# EAGLE board pulser (EAGLE 9.5.0)
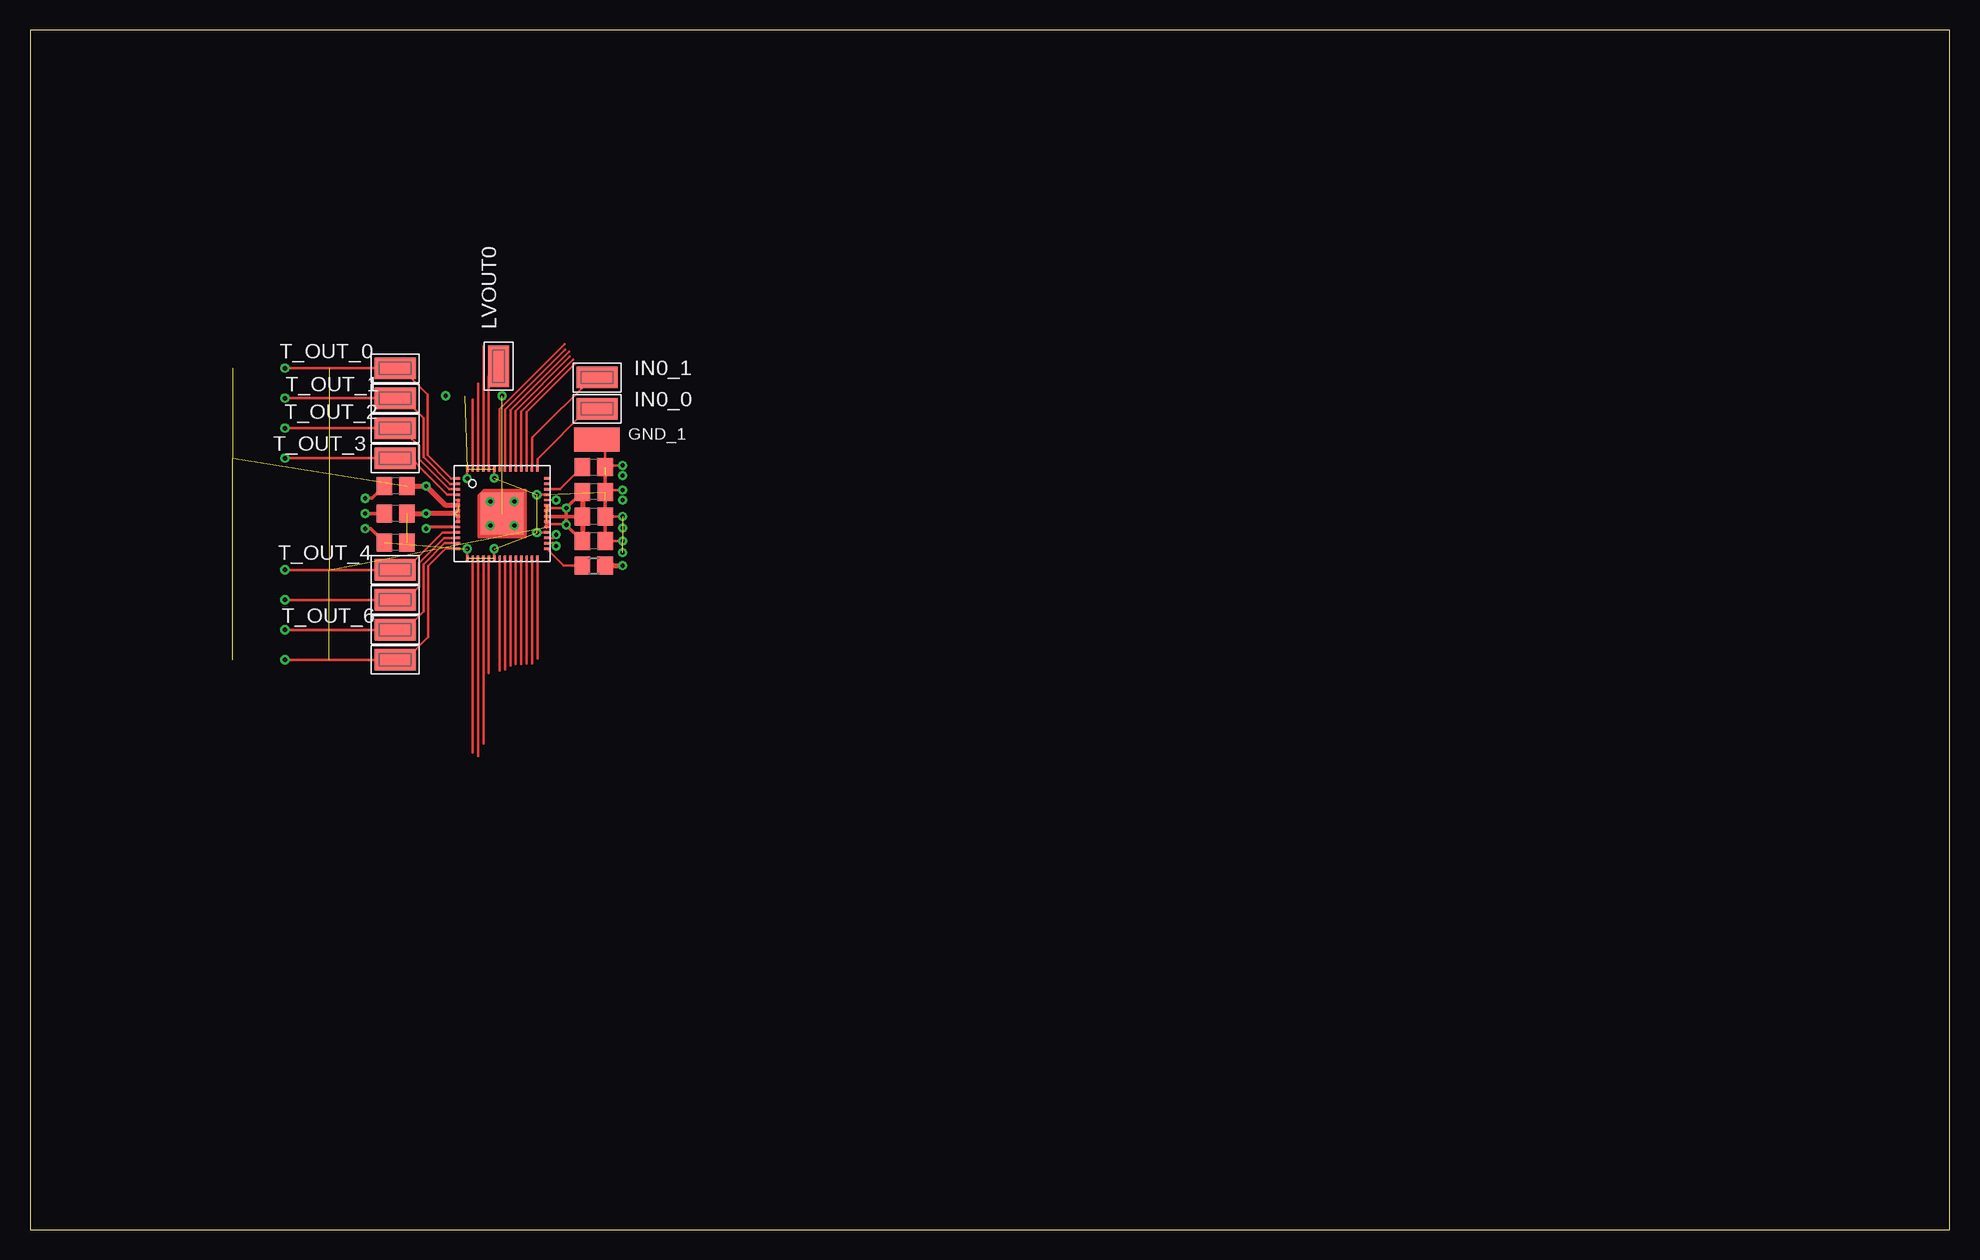
[diagram p0: board, top side]
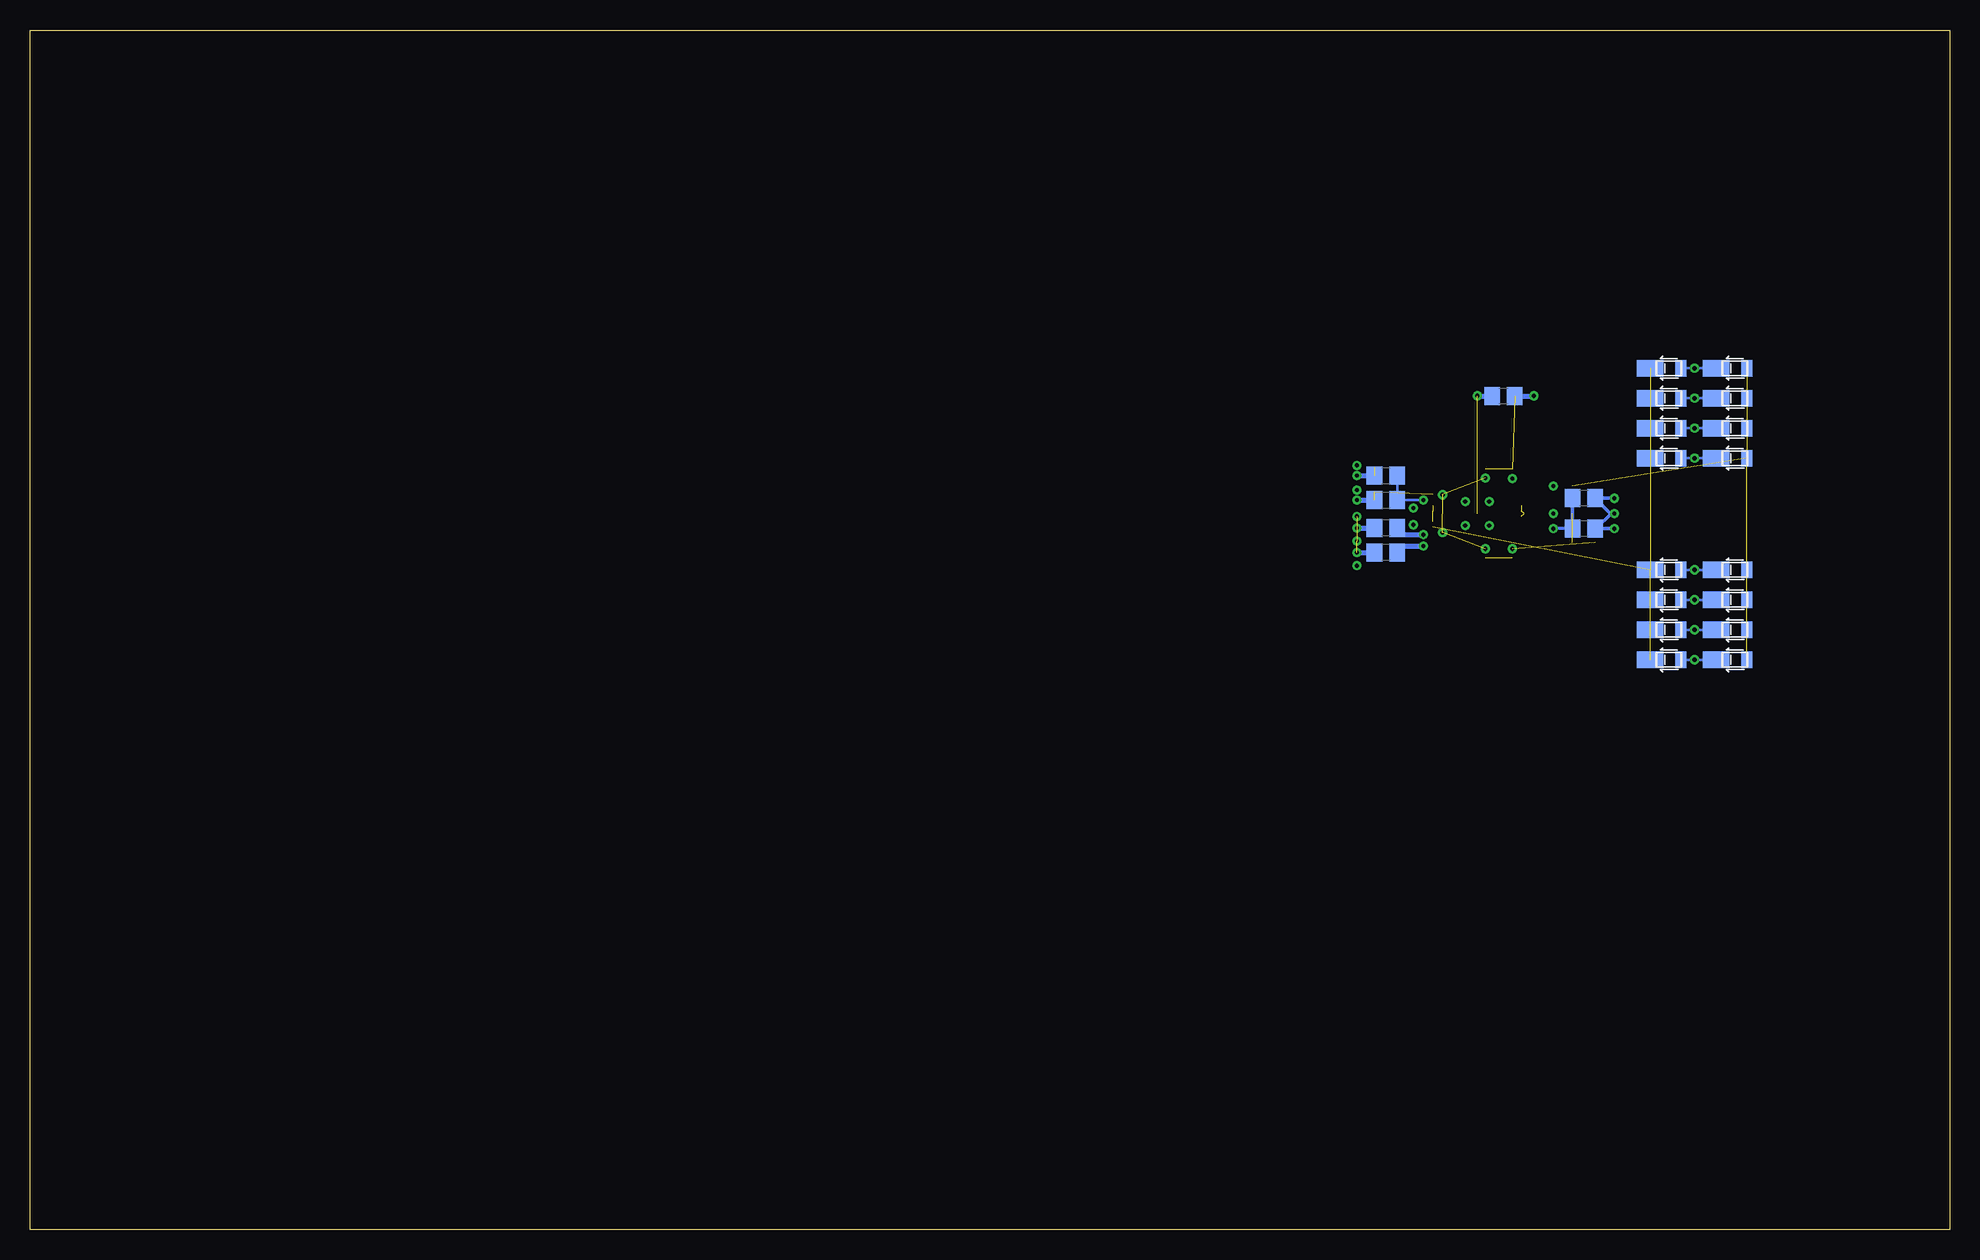
[diagram p1: board, bottom side, seen from below]

Size 160 x 100 mm. Coordinates in mm from the lower left corner, seen from the top.
Outline: 0,0 160,0 160,100 0,100 0,0
Copper layers (1*16): Top 0.035mm / dielectric 0.15mm / Bottom 0.035mm
Design rules "default": minimum track width 6mil, minimum drill 0.35mm, track to track 6mil, track to pad 6mil, pad to pad 6mil, via to via 6mil, smd to smd 6mil, copper to edge 40mil, drill to drill 6mil, minimum pad ring 10mil, minimum via ring 8mil, stop-mask expansion 4mil, vias tented up to drill 0mil, thermal gap 10mil
Net classes: 1 power_cw: width 0.2 mm; 2 power: width 0.3 mm

## Footprints (pad centres in the part's own frame; a part is rotated, then mirrored left to right if it is on the bottom)
C0805 = smd 1.3 x 1.5: 1 -0.95,0; 2 0.95,0
POWERDI-123 = smd 0.9 x 1.4: A -1.6,0 | smd 2.2 x 1.4: C 0.95,0
TP380X203 = smd 3.8 x 2.03: 1 0,0
KEYSTONE_5015 = smd 3.43 x 1.78: 1 0,0
R0805 = smd 1.3 x 1.5: 1 -0.95,0; 2 0.95,0
TFLGA-56LD = smd 0.4 x 0.2: AGND 3.7,-1.575; CK 3.7,2.925; CW 3.7,2.475; DGND 3.7,1.575; DVDD 3.7,2.025; HVM@1 -3.7,1.125; HVM@2 -3.7,0.675; HVM@3 -3.7,0.225; HVM@4 -3.7,-0.225; HVM@5 -3.7,-0.675; HVM_CW -3.7,-1.125; HVP@1 3.7,0.675; HVP@2 3.7,0.225; HVP@3 3.7,-0.225; HVP@4 3.7,-0.675; HVP@5 3.7,-1.125; HVP_CW 3.7,1.125; THSD 3.7,-2.925; VDDM 3.7,-2.025; VDDP 3.7,-2.475; XDCR_1 -3.7,2.925; XDCR_2 -3.7,2.475; XDCR_3 -3.7,2.025; XDCR_4 -3.7,1.575; XDCR_5 -3.7,-1.575; XDCR_6 -3.7,-2.025; XDCR_7 -3.7,-2.475; XDCR_8 -3.7,-2.925 | smd 0.2 x 0.4: GND_PWR@1 -2.925,-3.7; GND_PWR@2 -0.675,-3.7; GND_PWR@3 -0.675,3.7; GND_PWR@4 -2.925,3.7; IN1_0 2.925,3.7; IN1_1 2.475,3.7; IN2_0 2.025,3.7; IN2_1 1.575,3.7; IN3_0 1.125,3.7; IN3_1 0.675,3.7; IN4_0 0.225,3.7; IN4_1 -0.225,3.7; IN5_0 -0.225,-3.7; IN5_1 0.225,-3.7; IN6_0 0.675,-3.7; IN6_1 1.125,-3.7; IN7_0 1.575,-3.7; IN7_1 2.025,-3.7; IN8_0 2.475,-3.7; IN8_1 2.925,-3.7; LVOUT_1 -1.125,3.7; LVOUT_2 -1.575,3.7; LVOUT_3 -2.025,3.7; LVOUT_4 -2.475,3.7; LVOUT_5 -2.475,-3.7; LVOUT_6 -2.025,-3.7; LVOUT_7 -1.575,-3.7; LVOUT_8 -1.125,-3.7 | smd 3.5 x 3.5: SUB 0,0

## Placement (x,y rotation side)
C170  220n 100V  [C0805]  37.19,69.5 0 bottom
C172  220n 100V  [C0805]  47,61.5 180 top
C174  220n 100V  [C0805]  47,59.45 180 top
C175  220n 100V  [C0805]  47,57.4 180 top
C177  220n 100V  [C0805]  46.99,60.81 0 bottom
C178  220n 100V  [C0805]  46.99,62.85 0 bottom
C180  220n 100V  [C0805]  46.99,56.43 180 bottom
C181  220n 100V  [C0805]  46.99,58.47 180 bottom
C182  220n 100V  [C0805]  46.99,63.55 0 top
C183  220n 100V  [C0805]  30.48,61.98 180 top
C184  220n 100V  [C0805]  30.48,59.69 180 top
C185  220n 100V  [C0805]  30.48,57.28 180 top
C190  220n 100V  [C0805]  30.48,58.42 180 bottom
C191  220n 100V  [C0805]  30.48,60.96 180 bottom
D0_0  [POWERDI-123]  24,71.8 180 bottom
D0_1  [POWERDI-123]  18.5,71.8 180 bottom
D1_0  [POWERDI-123]  24,69.3 180 bottom
D1_1  [POWERDI-123]  18.5,69.3 180 bottom
D2_0  [POWERDI-123]  24,66.8 180 bottom
D2_1  [POWERDI-123]  18.5,66.8 180 bottom
D3_0  [POWERDI-123]  24,64.3 180 bottom
D3_1  [POWERDI-123]  18.5,64.3 180 bottom
D4_0  [POWERDI-123]  24,55 180 bottom
D4_1  [POWERDI-123]  18.5,55 180 bottom
D5_0  [POWERDI-123]  24,52.5 180 bottom
D5_1  [POWERDI-123]  18.5,52.5 180 bottom
D6_0  [POWERDI-123]  24,50 180 bottom
D6_1  [POWERDI-123]  18.5,50 180 bottom
D7_0  [POWERDI-123]  24,47.5 180 bottom
D7_1  [POWERDI-123]  18.5,47.5 180 bottom
GND_1  5019  [TP380X203]  47.26,65.85 0 top
IN0_0  5015  [KEYSTONE_5015]  47.26,68.42 0 top
IN0_1  5015  [KEYSTONE_5015]  47.26,71.03 0 top
LVOUT0  5015  [KEYSTONE_5015]  39.06,71.96 90 top
R2  10k  [R0805]  46.99,55.34 0 top
STHV_0  STHV800  [TFLGA-56LD]  39.37,59.69 0 top
T_OUT_0  5015  [KEYSTONE_5015]  30.45,71.8 0 top
T_OUT_1  5015  [KEYSTONE_5015]  30.45,69.3 0 top
T_OUT_2  5015  [KEYSTONE_5015]  30.45,66.8 0 top
T_OUT_3  5015  [KEYSTONE_5015]  30.45,64.3 0 top
T_OUT_4  5015  [KEYSTONE_5015]  30.45,55 0 top
T_OUT_5  5015  [KEYSTONE_5015]  30.45,52.5 0 top
T_OUT_6  5015  [KEYSTONE_5015]  30.45,50 0 top
T_OUT_7  5015  [KEYSTONE_5015]  30.45,47.5 0 top

## Library data of the parts
C170 C172 C174 C175 C177 C178 C180-C185 C190 C191 = rcl; SPICEPREFIX: C
D0_0 D0_1 D1_0 D1_1 D2_0 D2_1 D3_0 D3_1 D4_0 D4_1 D5_0 D5_1 D6_0 D6_1 D7_0 D7_1 = dfls130l-7; MF: Diodes Inc; MOUSER: SBR1U200P1-7; MPN: SBR1U200P1
GND_1 = 5019; AVAILABILITY: Good; DESCRIPTION: Phosphor Bronze Contact Miniature Silver Plated Surface Mount Test Points; MF: Keystone; MP: 5019; PACKAGE: 2010 Keystone; PRICE: 0.18 USD
IN0_0 IN0_1 LVOUT0 T_OUT_0 T_OUT_1-T_OUT_7 = keystone_5015; AVAILABILITY: Unavailable; DESCRIPTION: Test Point; Black; Surface Mount; Wire Leaded; Polycarbonate; 0.04 in.; MF: Keystone Electronics; MP: 5015; PACKAGE: Keystone Electronics; PRICE: None
R2 = rcl
STHV_0 = wouter

## Nets
CLK: STHV_0.CK
CW: STHV_0.CW
DVDD: C182.1 STHV_0.DVDD
GND [power_cw]: C170.2 C172.1 C174.1 C175.1 C177.1 C178.1 C180.2 C181.2 C182.2 C183.2 C184.2 C185.2 C190.1 C191.1 GND_1.1 STHV_0.AGND STHV_0.DGND STHV_0.GND_PWR@1 STHV_0.GND_PWR@2 STHV_0.GND_PWR@3 STHV_0.GND_PWR@4
HVM [power]: C183.1 C184.1 C185.1 D0_1.A D1_1.A D2_1.A D3_1.A D4_1.A D5_1.A D6_1.A D7_1.A STHV_0.HVM@1 STHV_0.HVM@2 STHV_0.HVM@3 STHV_0.HVM@4 STHV_0.HVM@5
HVM_CW [power_cw]: C190.2 C191.2 STHV_0.HVM_CW
HVP [power]: C172.2 C174.2 C175.2 D0_0.C D1_0.C D2_0.C D3_0.C D4_0.C D5_0.C D6_0.C D7_0.C STHV_0.HVP@1 STHV_0.HVP@2 STHV_0.HVP@3 STHV_0.HVP@4 STHV_0.HVP@5
HVP_CW: C177.2 C178.2 STHV_0.HVP_CW
IN0_0: IN0_0.1 STHV_0.IN1_0
IN0_1: IN0_1.1 STHV_0.IN1_1
IN1_0: STHV_0.IN2_0
IN1_1: STHV_0.IN2_1
IN2_0: STHV_0.IN3_0
IN2_1: STHV_0.IN3_1
IN3_0: STHV_0.IN4_0
IN3_1: STHV_0.IN4_1
IN4_0: STHV_0.IN5_0
IN4_1: STHV_0.IN5_1
IN5_0: STHV_0.IN6_0
IN5_1: STHV_0.IN6_1
IN6_0: STHV_0.IN7_0
IN6_1: STHV_0.IN7_1
IN7_0: STHV_0.IN8_0
IN7_1: STHV_0.IN8_1
LVOUT_0 [low_voltage]: LVOUT0.1 STHV_0.LVOUT_1
LVOUT_1 [low_voltage]: STHV_0.LVOUT_2
LVOUT_2 [low_voltage]: STHV_0.LVOUT_3
LVOUT_3 [low_voltage]: STHV_0.LVOUT_4
LVOUT_4 [low_voltage]: STHV_0.LVOUT_5
LVOUT_5 [low_voltage]: STHV_0.LVOUT_6
LVOUT_6 [low_voltage]: STHV_0.LVOUT_7
LVOUT_7 [low_voltage]: STHV_0.LVOUT_8
N$23: R2.1 STHV_0.THSD
N$24: C170.1 STHV_0.SUB
OUT_0: D0_0.A D0_1.C STHV_0.XDCR_1 T_OUT_0.1
OUT_1: D1_0.A D1_1.C STHV_0.XDCR_2 T_OUT_1.1
OUT_2: D2_0.A D2_1.C STHV_0.XDCR_3 T_OUT_2.1
OUT_3: D3_0.A D3_1.C STHV_0.XDCR_4 T_OUT_3.1
OUT_4: D4_0.A D4_1.C STHV_0.XDCR_5 T_OUT_4.1
OUT_5: D5_0.A D5_1.C STHV_0.XDCR_6 T_OUT_5.1
OUT_6: D6_0.A D6_1.C STHV_0.XDCR_7 T_OUT_6.1
OUT_7: D7_0.A D7_1.C STHV_0.XDCR_8 T_OUT_7.1
VDD: R2.2
VDDM [power_cw]: C181.1 STHV_0.VDDM
VDDP [power_cw]: C180.1 STHV_0.VDDP

## Tracks (layer width: path | path; a pad name or v marks a point on that pad's centre or on a via)
DVDD
  Top 0.2: 45.72,63.55 C182.1 44.2,61.72 44.19,61.72 STHV_0.DVDD
  Top 0.3: C182.1 46.04,63.87
GND  (via drill 0.35)  (16 unrouted)
  Top 0.2: C175.1 v49.4,57.4 | C174.1 v49.4,59.45 | C172.1 48.1,61.65 v49.4,61.65 | v49.4,63.7 48.09,63.7 C182.2 47.94,65.17 GND_1.1 | STHV_0.GND_PWR@1 v36.45,56.74 v36.45,56.75 | STHV_0.AGND 42.27,58.12 | STHV_0.GND_PWR@2 v38.7,56.74 v38.7,56.75 | STHV_0.DGND 42.27,61.27 | STHV_0.GND_PWR@4 v36.45,62.6 | STHV_0.GND_PWR@3 v38.7,62.65
  Top 0.3: C183.2 28.51,60.96 v27.94,60.96 | C184.2 v27.94,59.69 | C185.2 28.39,58.42 v27.94,58.42 | C175.1 47.94,57.48 C172.1 C182.2
  Top 0.4: 29.46,61.98 C183.2
  Bottom 0.3: v27.94,60.96 C191.1 28.26,59.69 v27.94,59.69 28.19,59.69 29.46,58.42 C190.1 v27.94,58.42
  Bottom 0.4: v49.4,56.43 C180.2 | v49.4,58.47 C181.2 | v49.4,60.81 C177.1 | v49.4,62.85 C178.1 | C170.2 v34.65,69.5
  other vias: 42.25,58.1 42.25,61.25
HVM  (via drill 0.35)  (12 unrouted)
  Top 0.3: STHV_0.HVM@1 35.67,59.75 | 35.67,59.75 STHV_0.HVM@5 | v33.02,59.69 35.61,59.69 35.67,59.75
  Top 0.4: C183.1 v33.02,61.98 33.3,61.69 33.32,61.69 34.65,60.37 STHV_0.HVM@2 | C184.1 v33.02,59.69 35.45,59.69
HVM_CW  (via drill 0.35)
  Top 0.254: STHV_0.HVM_CW 33.16,58.56 v33.02,58.42
  Bottom 0.254: C190.2 v33.02,58.42
  Bottom 0.3: C191.2 C190.2
HVP  (via drill 0.35)  (11 unrouted)
  Top 0.2: v44.7,60.15 43.07,60.15 | 44.65,58.8 43.07,58.8
  Top 0.3: STHV_0.HVP@1 43.07,60.15 STHV_0.HVP@3 | STHV_0.HVP@3 43.07,58.8 STHV_0.HVP@5 | C172.2 v44.7,60.15 v44.7,58.75 | C174.2 STHV_0.HVP@3 | C175.2 v44.7,58.75 | v44.7,58.75 44.65,58.8
  Top 0.4: 46.03,61.5 C172.2 C174.2 C175.2
HVP_CW  (via drill 0.35)
  Top 0.2: v43.84,60.81 STHV_0.HVP_CW
  Top 0.254: v43.85,60.81 v43.84,60.81
  Bottom 0.2: v43.85,60.81 C177.2 C178.2
IN0_0
  Top 0.2: STHV_0.IN1_0 42.3,64.25 46.47,68.42 IN0_0.1
IN0_1
  Top 0.2: STHV_0.IN1_1 41.84,66 41.9,66.05 46.88,71.03 IN0_1.1
IN1_0
  Top 0.2: STHV_0.IN2_0 41.4,68.15 45.45,72.2
IN1_1
  Top 0.2: STHV_0.IN2_1 40.95,68.2 45.27,72.53
IN2_0
  Top 0.2: STHV_0.IN3_0 40.49,68.25 45,72.75
IN2_1
  Top 0.2: STHV_0.IN3_1 40.05,68.3 44.95,73.2
IN3_0
  Top 0.2: STHV_0.IN4_0 39.59,68.35 44.6,73.35
IN3_1
  Top 0.2: STHV_0.IN4_1 39.15,68.39 44.55,73.8
IN4_0
  Top 0.2: STHV_0.IN5_0 39.15,46.6
IN4_1
  Top 0.2: STHV_0.IN5_1 39.59,46.7
IN5_0
  Top 0.2: STHV_0.IN6_0 40.05,47.01
IN5_1
  Top 0.2: STHV_0.IN6_1 40.49,47.16
IN6_0
  Top 0.2: STHV_0.IN7_0 40.95,47.2 40.95,47.15
IN6_1
  Top 0.2: STHV_0.IN7_1 41.4,47.19
IN7_0
  Top 0.2: STHV_0.IN8_0 41.84,47.2
IN7_1
  Top 0.2: STHV_0.IN8_1 42.3,47.6
LVOUT_0
  Top 0.2: LVOUT0.1 38.24,71.14 STHV_0.LVOUT_1
LVOUT_1
  Top 0.2: 37.8,73.66 STHV_0.LVOUT_2
LVOUT_2
  Top 0.2: 37.34,70.5 STHV_0.LVOUT_3
LVOUT_3
  Top 0.2: 36.9,69.2 STHV_0.LVOUT_4
LVOUT_4
  Top 0.2: STHV_0.LVOUT_5 36.9,39.76
LVOUT_5
  Top 0.2: STHV_0.LVOUT_6 37.34,39.49
LVOUT_6
  Top 0.2: STHV_0.LVOUT_7 37.8,40.51
LVOUT_7
  Top 0.2: STHV_0.LVOUT_8 38.24,46.4
N$5  (via drill 0.35)
  other vias: 40.37,60.69
N$6  (via drill 0.35)
  other vias: 38.37,60.69
N$7  (via drill 0.35)
  other vias: 38.37,58.69
N$8  (via drill 0.35)
  other vias: 40.37,58.69
N$23
  Top 0.2: STHV_0.THSD 44.49,55.34 R2.1
N$24  (via drill 0.35)  (1 unrouted)
  Bottom 0.4: v39.35,69.5 C170.1
OUT_0  (via drill 0.35)
  Top 0.2: STHV_0.XDCR_1 35.09,62.62 33.15,64.56 33.15,69.6 30.95,71.8 T_OUT_0.1 v21.25,71.8
  Bottom 0.2: D0_0.A v21.25,71.8 D0_1.C
OUT_1  (via drill 0.35)
  Top 0.2: STHV_0.XDCR_2 35.02,62.16 32.8,64.39 32.8,67.65 31.15,69.3 T_OUT_1.1 v21.25,69.3
  Bottom 0.2: D1_1.C v21.25,69.3 D1_0.A
OUT_2  (via drill 0.35)
  Top 0.2: STHV_0.XDCR_3 34.94,61.72 32.42,64.23 32.42,65.3 31.45,66.26 31.45,66.95 30.6,66.95 T_OUT_2.1 v21.25,66.8
  Bottom 0.2: D2_1.C v21.25,66.8 D2_0.A
OUT_3  (via drill 0.35)
  Top 0.2: STHV_0.XDCR_4 34.78,61.27 32.95,63.1 31.75,64.3 T_OUT_3.1 v21.25,64.3
  Bottom 0.2: D3_1.C v21.25,64.3 D3_0.A
OUT_4  (via drill 0.35)
  Top 0.2: STHV_0.XDCR_5 34.38,58.12 31.27,55 T_OUT_4.1 v21.25,55
  Bottom 0.2: D4_1.C v21.25,55 D4_0.A
OUT_5  (via drill 0.35)
  Top 0.2: STHV_0.XDCR_6 34.51,57.66 32.42,55.57 32.42,53.6 31.31,52.5 T_OUT_5.1 v21.25,52.5
  Bottom 0.2: D5_1.C v21.25,52.5 D5_0.A
OUT_6  (via drill 0.35)
  Top 0.2: STHV_0.XDCR_7 34.57,57.22 32.8,55.45 32.8,51.54 31.26,50 T_OUT_6.1 v21.25,50
  Bottom 0.2: D6_1.C v21.25,50 D6_0.A
OUT_7  (via drill 0.35)
  Top 0.2: STHV_0.XDCR_8 34.66,56.77 33.2,55.3 33.2,49.4 31.3,47.5 T_OUT_7.1 v21.25,47.5
  Bottom 0.2: D7_1.C v21.25,47.5 D7_0.A
VDD  (via drill 0.35)
  Top 0.4: R2.2 v49.4,55.34
VDDM  (via drill 0.35)
  Top 0.2: v43.85,57.92 43.59,57.66 STHV_0.VDDM
  Bottom 0.4: v43.85,57.92 45.49,57.92 C181.1
VDDP  (via drill 0.35)
  Top 0.2: STHV_0.VDDP 43.75,57.22 43.85,57.12 v43.85,56.98
  Bottom 0.4: v43.85,56.98 45.49,56.98 C180.1